# Allegro board MY_CAD_1.brd
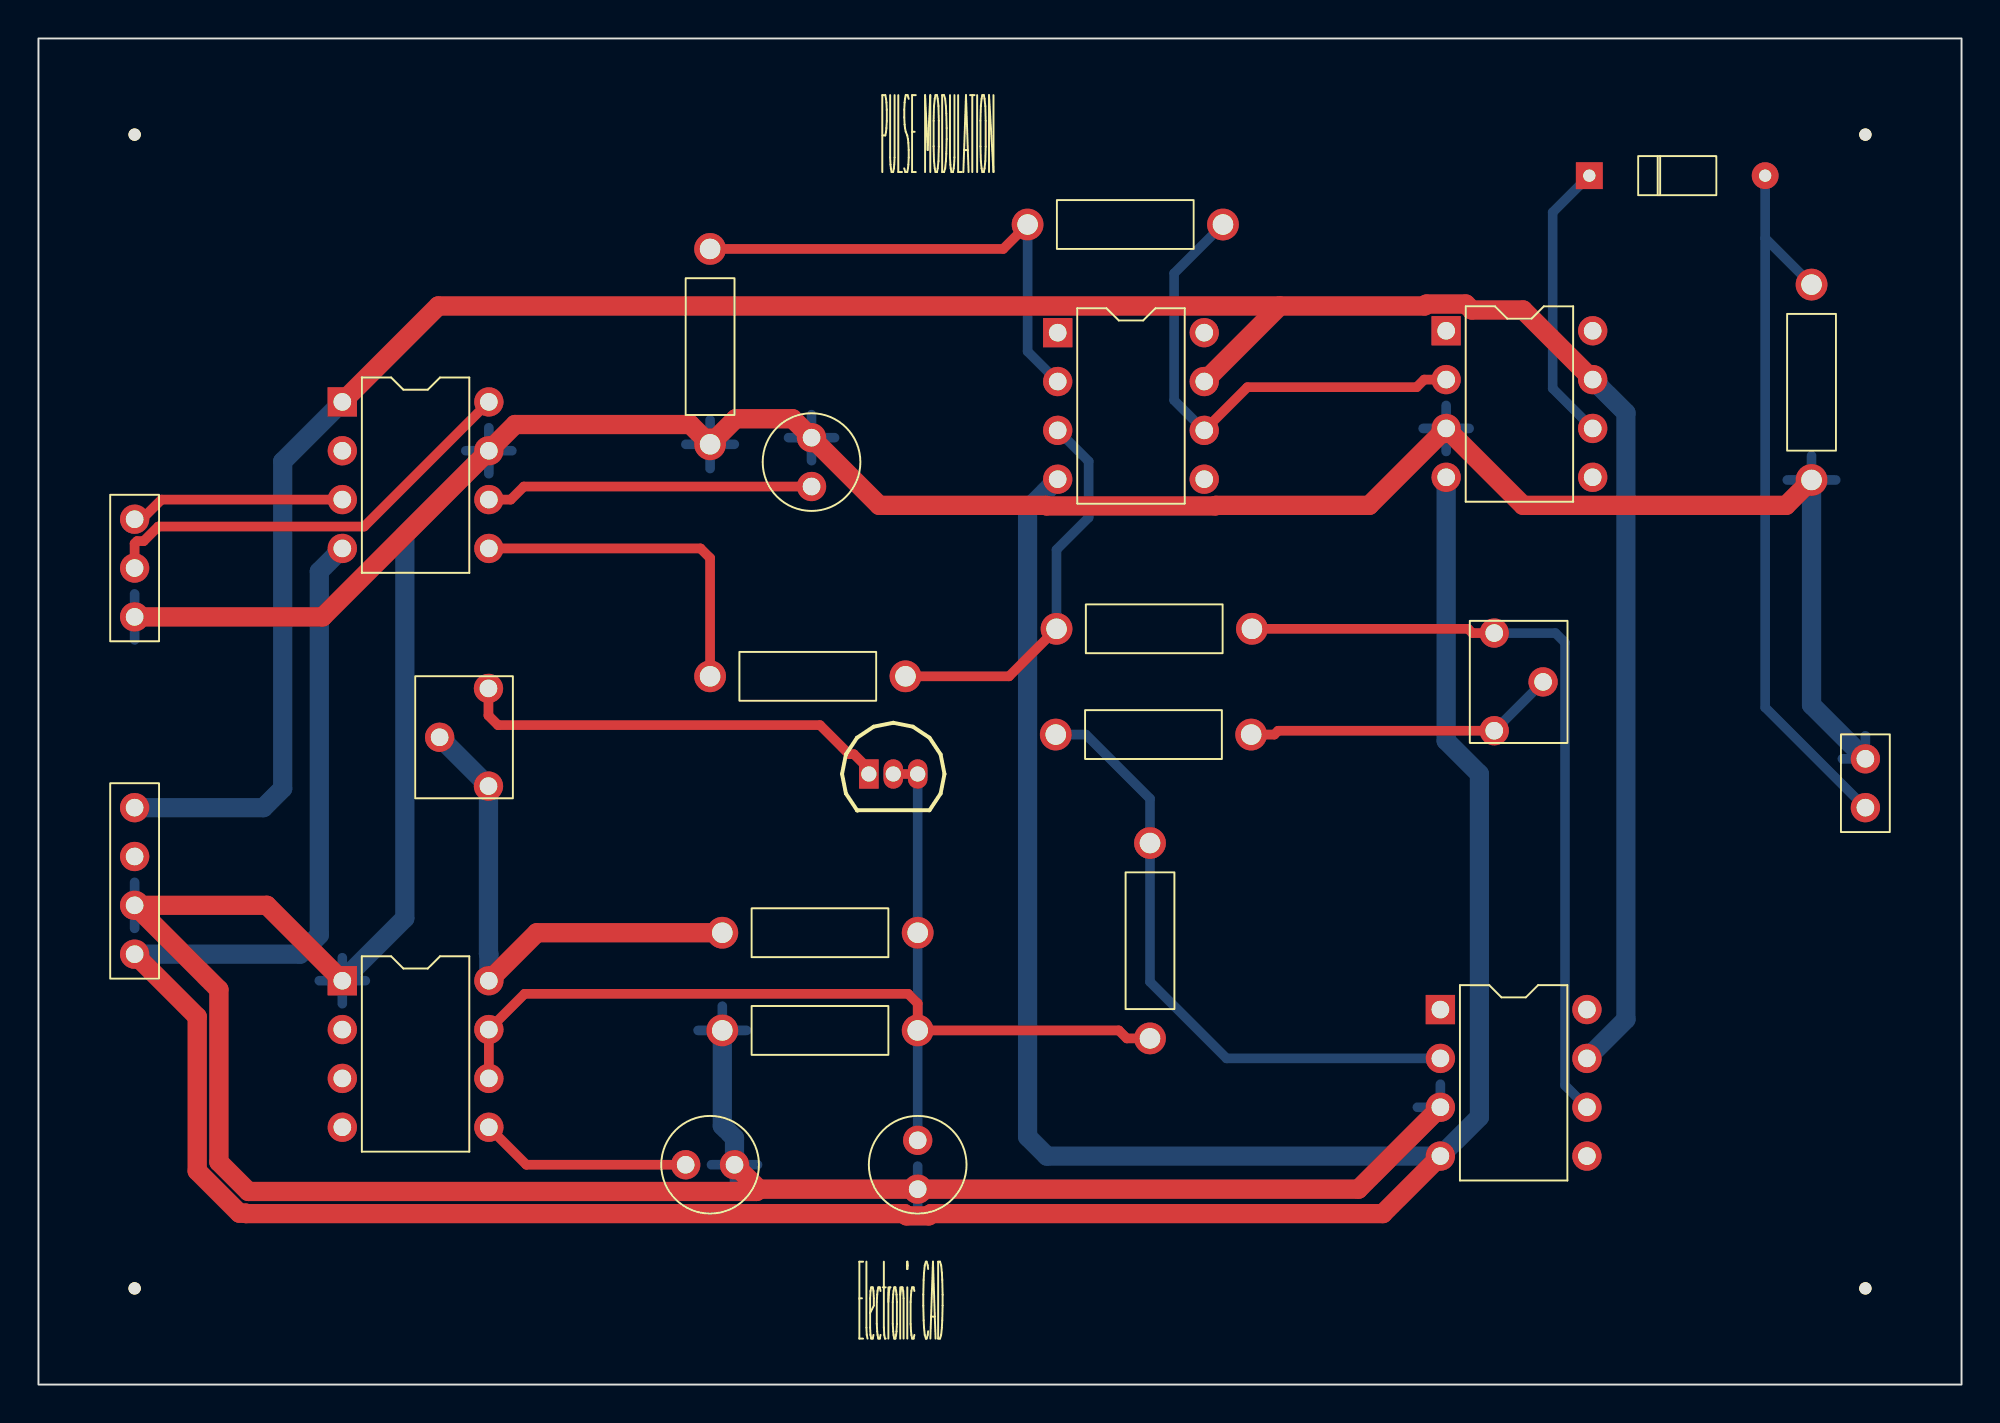
[diagram p0: board, top side]
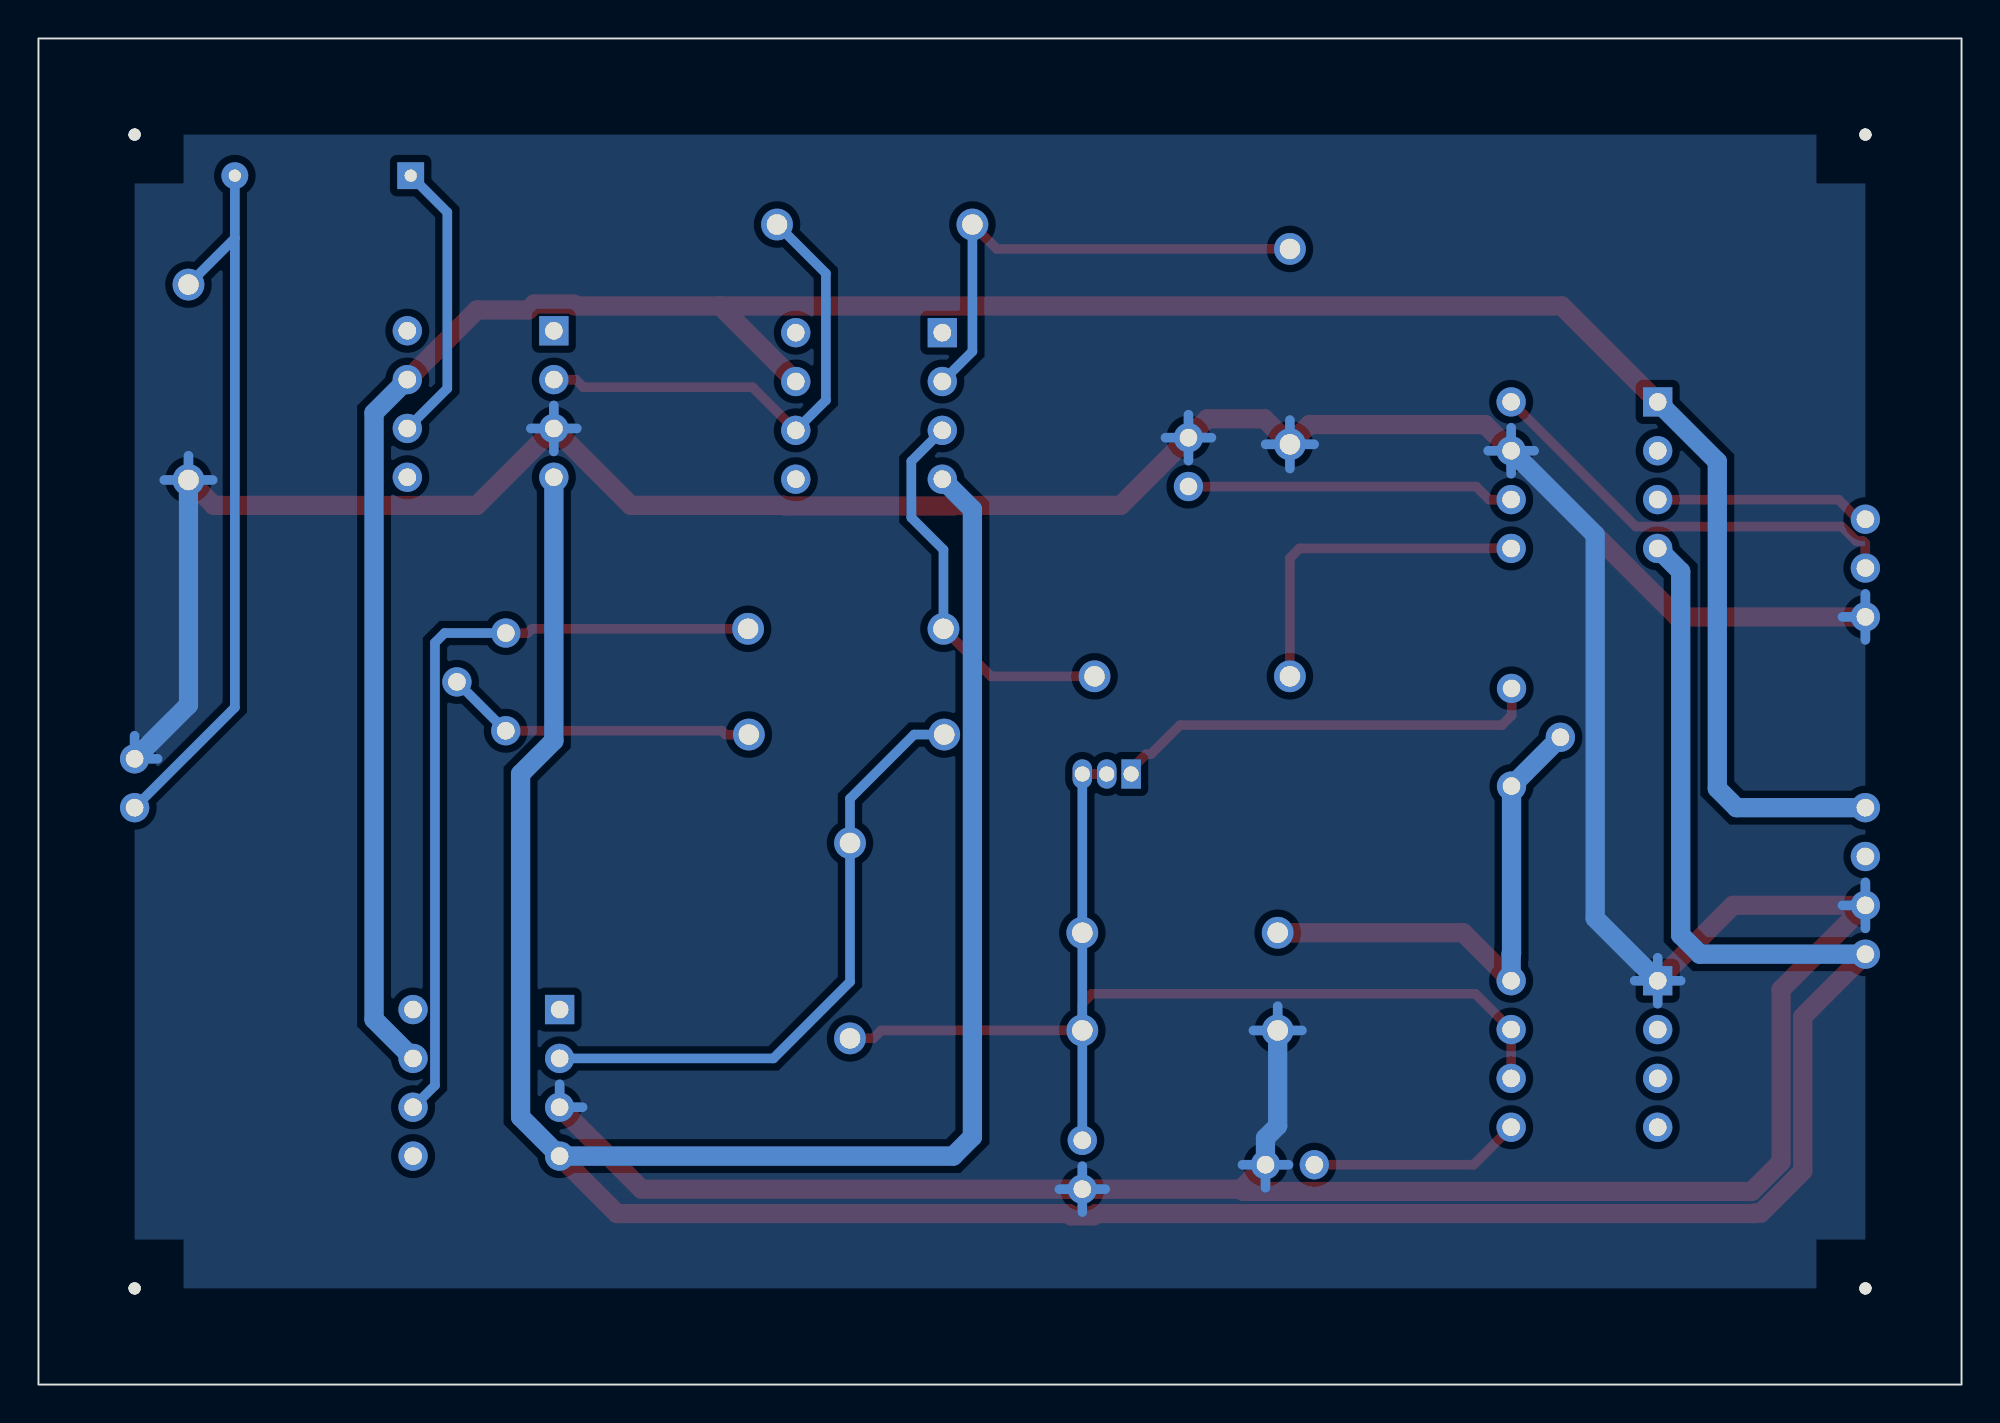
[diagram p1: board, bottom side, seen from below]

Outline 100 x 70 mm; copper layers: TOP, BOTTOM. Coordinates in mm from the lower left corner of the outline.
Outline path: rectangle 0,0 100,70

## Design rules (mm)
constraint set DEFAULT: min track width 0.5, pair gap 0.5
net group POWERNETS: nets 5V 15V +5V -15V

## Placement (name value [footprint] x y rotation side)
C1  0.01uF  [CAP196]  33.66 11.43 270 top
C2  0.01uF  [CAP196]  45.72 12.7 180 top
C3  0.01uF  [CAP196]  40.2 46.7 0 top
D1  D1S1588  [DO35]  80.64 62.87 270 top
J2  CON4  [JUMPER4]  5 30 270 top
J3  CON3  [JUMPER3]  5 45 270 top
J4  CON2  [JUMPER2]  95 30 90 top
NOREF  -  [unnamed]  95 65 0 top
NOREF#2  -  [unnamed]  5 65 0 top
NOREF#3  -  [unnamed]  95 5 0 top
NOREF#4  -  [unnamed]  5 5 0 top
NOREF#5  -  [#2]  0 70 0 top
NOREF#6  -  [#2]  100 0 90 top
Q1  Q2SA1015  [TO92]  43.18 31.75 0 top
R1  100k  [RES400]  45.72 18.41 90 top
R2  39k  [RES400]  35.56 23.5 270 top
R3  6.2k  [RES400]  57.8 18 0 top
R4  560  [RES400]  52.9 33.8 270 top
R5  10k  [RES400]  34.92 36.83 270 top
R6  R  [RES400]  63.1 39.3 90 top
R7  10k  [RES400]  51.44 60.33 270 top
R8  10k  [RES400]  34.92 59.05 180 top
R9  10k  [RES400]  92.2 57.2 180 top
U2  NE555  [DIP8_3]  15.8 21 0 top
U3  LF356  [DIP8_3]  72.9 19.5 0 top
U4  LF398  [DIP8_3]  15.8 51.1 0 top
U5  LF356  [DIP8_3]  53 54.7 0 top
U6  LF356  [DIP8_3]  73.2 54.8 0 top
VR1  5k  [RESADJ]  23.4 36.2 0 top
VR2  20k  [RESADJ]  75.7 34 180 top

## Library data of the parts
C1-C3 = CAP NP: Tolerance: ***; User Part Number: ***
D1 = D1S1588
J2 = CON4: User Part Number: ***
J3 = CON3: User Part Number: ***
J4 = CON2: User Part Number: ***
Q1 = Q2SA1015
R1-R9 = R: Tolerance: ***; User Part Number: ***
U2 = NE555_0: Tolerance: ***; User Part Number: ***
U3 U5 U6 = LF356: Tolerance: ***; User Part Number: ***
U4 = LF398_0: Tolerance: ***; User Part Number: ***
VR1 VR2 = POT: Tolerance: ***; User Part Number: ***

## Footprints (pads in the part's own frame, mm; a bottom-side part is the same pattern mirrored in y, then rotated)
CAP196
  round 1.524 hole 0.914: 1(0,0) 2(0,2.54)
DIP8_3
  rect 1.524x1.524 hole 0.914: 1(0,0)
  round 1.524 hole 0.914: 2(0,-2.54) 3(0,-5.08) 4(0,-7.62) 5(7.62,-7.62) 6(7.62,-5.08) 7(7.62,-2.54) 8(7.62,0)
DO35
  rect 1.397x1.397 hole 0.635: 1(0,0)
  round 1.397 hole 0.635: 2(0,9.144)
JUMPER2
  round 1.524 hole 0.914: 1(0,0) 2(2.54,0)
JUMPER3
  round 1.524 hole 0.914: 1(0,0) 2(2.54,0) 3(5.08,0)
JUMPER4
  round 1.524 hole 0.914: 1(0,0) 2(2.54,0) 3(5.08,0) 4(7.62,0)
RES400
  round 1.651 hole 1.067: 1(0,0) 2(0,10.16)
RESADJ
  round 1.524 hole 0.914: 1(0,0) 2(-2.54,-2.54) 3(0,-5.08)
TO92
  rect 1.016x1.524 hole 0.787: 1(0,0)
  oval 1.016x1.524 hole 0.787: 2(1.27,0) 3(2.54,0)
unnamed
  round 0.635 hole 3.175 unplated: (0,0)

## Nets
5V: R2.1 U2.8(VCC) VR1.2(WIPER) VR1.3
15V: J2.1 U3.7 U4.1 U5.7 U6.7
+5V: J2.2
-15V: J2.4 U3.4(V-) U4.4(V-) U5.4(V-) U6.4(V-)
GND: C1.2 C2.2 C3.2 J2.3 J3.3 J4.2 R1.2 R8.2 R9.2 U2.1 U3.3 U4.7 U6.3
CLOCK: U2.2
SIG_1: R6.1 U3.6 VR2.3
N00171: C1.1 U2.5
N00178: C2.1 Q1.2 Q1.3 R1.1 R2.2 R3.1 U2.6 U2.7
N00341: Q1.1(E) VR1.1
N00651: R3.2 R4.1 U3.2
N00900: R4.2 VR2.1 VR2.2(WIPER)
N01954: J3.2 U4.8
N01961: J3.1 U4.3
N01977: C3.1 U4.6
N02222: R5.2 R6.2 U5.3
N02442: R7.1 R8.1 U5.2
N02504: R7.2 U5.6 U6.2
N02902: D1.1 U6.6
N02962: D1.2 J4.1 R9.1
N014781: R5.1 U4.5

Pads without a net: U2 3 4; U3 1 5 8; U4 2; U5 1 5 8; U6 1 5 8

## Routing (per net, layer and track width the routed paths; a pad name or vN(x,y) marks a point on that pad's centre or on a via; arc(x,y) is an arc through that point)
5V: length 26.9
  TOP w1: R2.1 25.91,23.5 U2.8
  BOTTOM w1: U2.8 23.42,22.39 23.4,22.41 VR1.3 VR1.2
15V: length 140.7
  TOP w1: U4.1 20.79,56.09 64.55,56.09 ; U5.7 64.55,56.09 ; 64.55,56.09 72.08,56.09 72.18,56.19 74.22,56.19 74.53,55.88 77.2,55.88 U6.7
  BOTTOM w1: U3.7 82.55,18.99 82.55,50.53 U6.7 ; J2.1 11.7,30 12.7,31 12.7,48 U4.1
-15V: length 203.7
  TOP w1: J2.4 8.26,19.12 8.26,11.11 10.45,8.91 10.77,8.91 10.79,8.89 45.02,8.89 45.14,8.77 46.3,8.77 46.41,8.89 69.91,8.89 U3.4
  BOTTOM w1: U5.4 51.44,45.52 51.44,12.88 52.44,11.88 U3.4 74.93,13.91 74.93,31.75 73.2,33.48 U6.4 ; J2.4 13.61,22.38 14.61,23.38 14.61,42.28 U4.4
GND: length 299.2
  TOP w1: U3.3 68.64,10.16 C2.2 37.47,10.16 ; J2.3 9.38,20.54 9.38,11.57 10.91,10.04 37.35,10.04 37.47,10.16 ; J2.3 5,24.84 ; J2.3 11.88,24.92 U2.1 ; 37.47,10.16 C1.2 ; R9.2 90.88,45.72 77.2,45.72 U6.3 69.2,45.72 61.23,45.72 61.2,45.69 52.42,45.69 52.4,45.72 43.72,45.72 C3.2 39.22,50.22 36.25,50.22 34.92,48.9 33.9,49.92 24.78,49.92 U4.7 14.78,39.92 J3.3
  BOTTOM w0.5: 15.8,19.8 U2.1 ; U2.1 15.8,22.2 ; U2.1 14.6,21 ; U2.1 17,21 ; J2.3 5,26.12 ; J2.3 5,23.72 ; J2.3 6.2,24.92 ; 34.3,18.41 R1.2 ; R1.2 35.56,19.68 ; R1.2 36.82,18.41 ; 39,49.24 C3.2 ; C3.2 40.2,50.44 ; C3.2 40.2,48.04 ; C3.2 41.4,49.24 ; 95,33.74 J4.2 93.8,32.54 ; 72,49.72 U6.3 ; U6.3 73.2,48.52 ; U6.3 73.2,50.92 ; U6.3 74.4,49.72 ; 23.42,47.36 U4.7 ; U4.7 23.42,49.76 ; U4.7 24.62,48.56 ; U4.7 22.22,48.56 ; 45.72,8.96 C2.2 ; C2.2 45.72,11.36 ; C2.2 46.92,10.16 ; C2.2 44.52,10.16 ; R9.2 93.46,47.04 ; R9.2 90.94,47.04 ; R9.2 92.2,48.3 ; 5,38.72 J3.3 ; J3.3 5,41.12 ; J3.3 6.2,39.92 ; 34.92,47.63 34.92,48.9 ; 34.92,48.9 34.92,50.16 ; 34.92,48.9 33.66,48.9 ; 34.92,48.9 36.19,48.9 ; 71.7,14.42 U3.3 72.9,15.62 ; 36.2,10.23 C1.2 ; C1.2 37.39,11.43 ; C1.2 35,11.43
  BOTTOM w1: J4.2 92.2,35.34 R9.2 ; R1.2 35.56,13.46 36.2,12.82 C1.2 ; U4.7 19.05,44.19 19.05,24.25 U2.1
SIG_1: length 41.2
  TOP w0.5: VR2.3 74.56,39.08 74.34,39.3 R6.1
  BOTTOM w0.5: VR2.3 78.88,39.08 79.38,38.58 79.38,15.56 U3.6
N00171: length 11
  TOP w0.5: C1.1 25.37,11.43 U2.5
N00178: length 59.8
  TOP w0.5: R3.1 56.6,18 56.18,18.41 R1.1 45.72,19.82 45.22,20.32 25.28,20.32 U2.7 U2.6 ; Q1.2 Q1.3
  BOTTOM w0.5: Q1.3 R2.2 R1.1 C2.1
N00341: length 22.6
  TOP w0.5: VR1.1 23.4,34.79 23.9,34.29 40.64,34.29 42.15,32.78 42.4,32.78 43.18,32 Q1.1
N00651: length 32.6
  BOTTOM w0.5: U3.2 61.78,16.96 57.8,20.94 R3.2 57.8,30.47 54.47,33.8 R4.1
N00900: length 16.3
  TOP w0.5: R4.2 64.26,33.8 64.46,34 VR2.1
  BOTTOM w0.5: VR2.2 VR2.1
N01954: length 22.7
  TOP w0.5: J3.2 5,43.73 5.13,43.86 5.47,43.86 6.23,44.62 16.94,44.62 U4.8
N01961: length 11.2
  TOP w0.5: J3.1 5.38,45 6.4,46.02 U4.3
N01977: length 17.1
  TOP w0.5: C3.1 25.24,46.7 24.56,46.02 U4.6
N02222: length 20.6
  TOP w0.5: R5.2 50.47,36.83 R6.2
  BOTTOM w0.5: U5.3 54.61,48.01 54.61,45.09 52.94,43.41 R6.2
N02442: length 25.8
  TOP w0.5: R8.1 50.16,59.05 R7.1
  BOTTOM w0.5: R7.1 51.44,53.73 U5.2
N02504: length 26.1
  TOP w0.5: U5.6 62.87,51.87 71.67,51.87 72.06,52.26 U6.2
  BOTTOM w0.5: R7.2 59.05,57.78 59.05,51.19 U5.6
N02902: length 14.8
  BOTTOM w0.5: U6.6 78.74,51.8 78.74,60.96 D1.1
N02962: length 38.4
  BOTTOM w0.5: J4.1 89.79,35.21 89.79,59.61 ; D1.2 89.79,59.61 ; 89.79,59.61 R9.1
N014781: length 17.9
  TOP w0.5: R5.1 34.92,42.98 34.42,43.48 U4.5

## Copper pours and planes (outline as drawn; the poured copper is in the pictures)
GND on BOTTOM: 95,5 95,65 5,65 5,5 ; 1 cut-out

## Text on the board
Ref Des/Silkscreen Top: Electronic CAD | PULSE MODULATION
DIMENSION: FIGURE | FINISHED_SIZE | 0.33 | 0.635 | 0.787 | 0.914 | 1.067 | 3.175 | DRILL CHART: TOP to BOTTOM | ALL UNITS ARE IN MILLIMETERS | PLATED | NON-PLATED | QTY | 1 | 2 | 3 | 61 | 18 | 4
